# Altium PCB NanoPiAir_Shield_V1.PcbDoc (part 1 of 2)
Units mm, origin at the board's own origin, x right, y up, seen from the top; angles counter-clockwise.
Board outline 40 x 40 mm, 4 copper layers (Top Copper, Signal Layer 1, Signal Layer 2, Bottom Copper), stack 1.57 mm thick; 74 components, 57 nets, 352 pads, 255 vias.
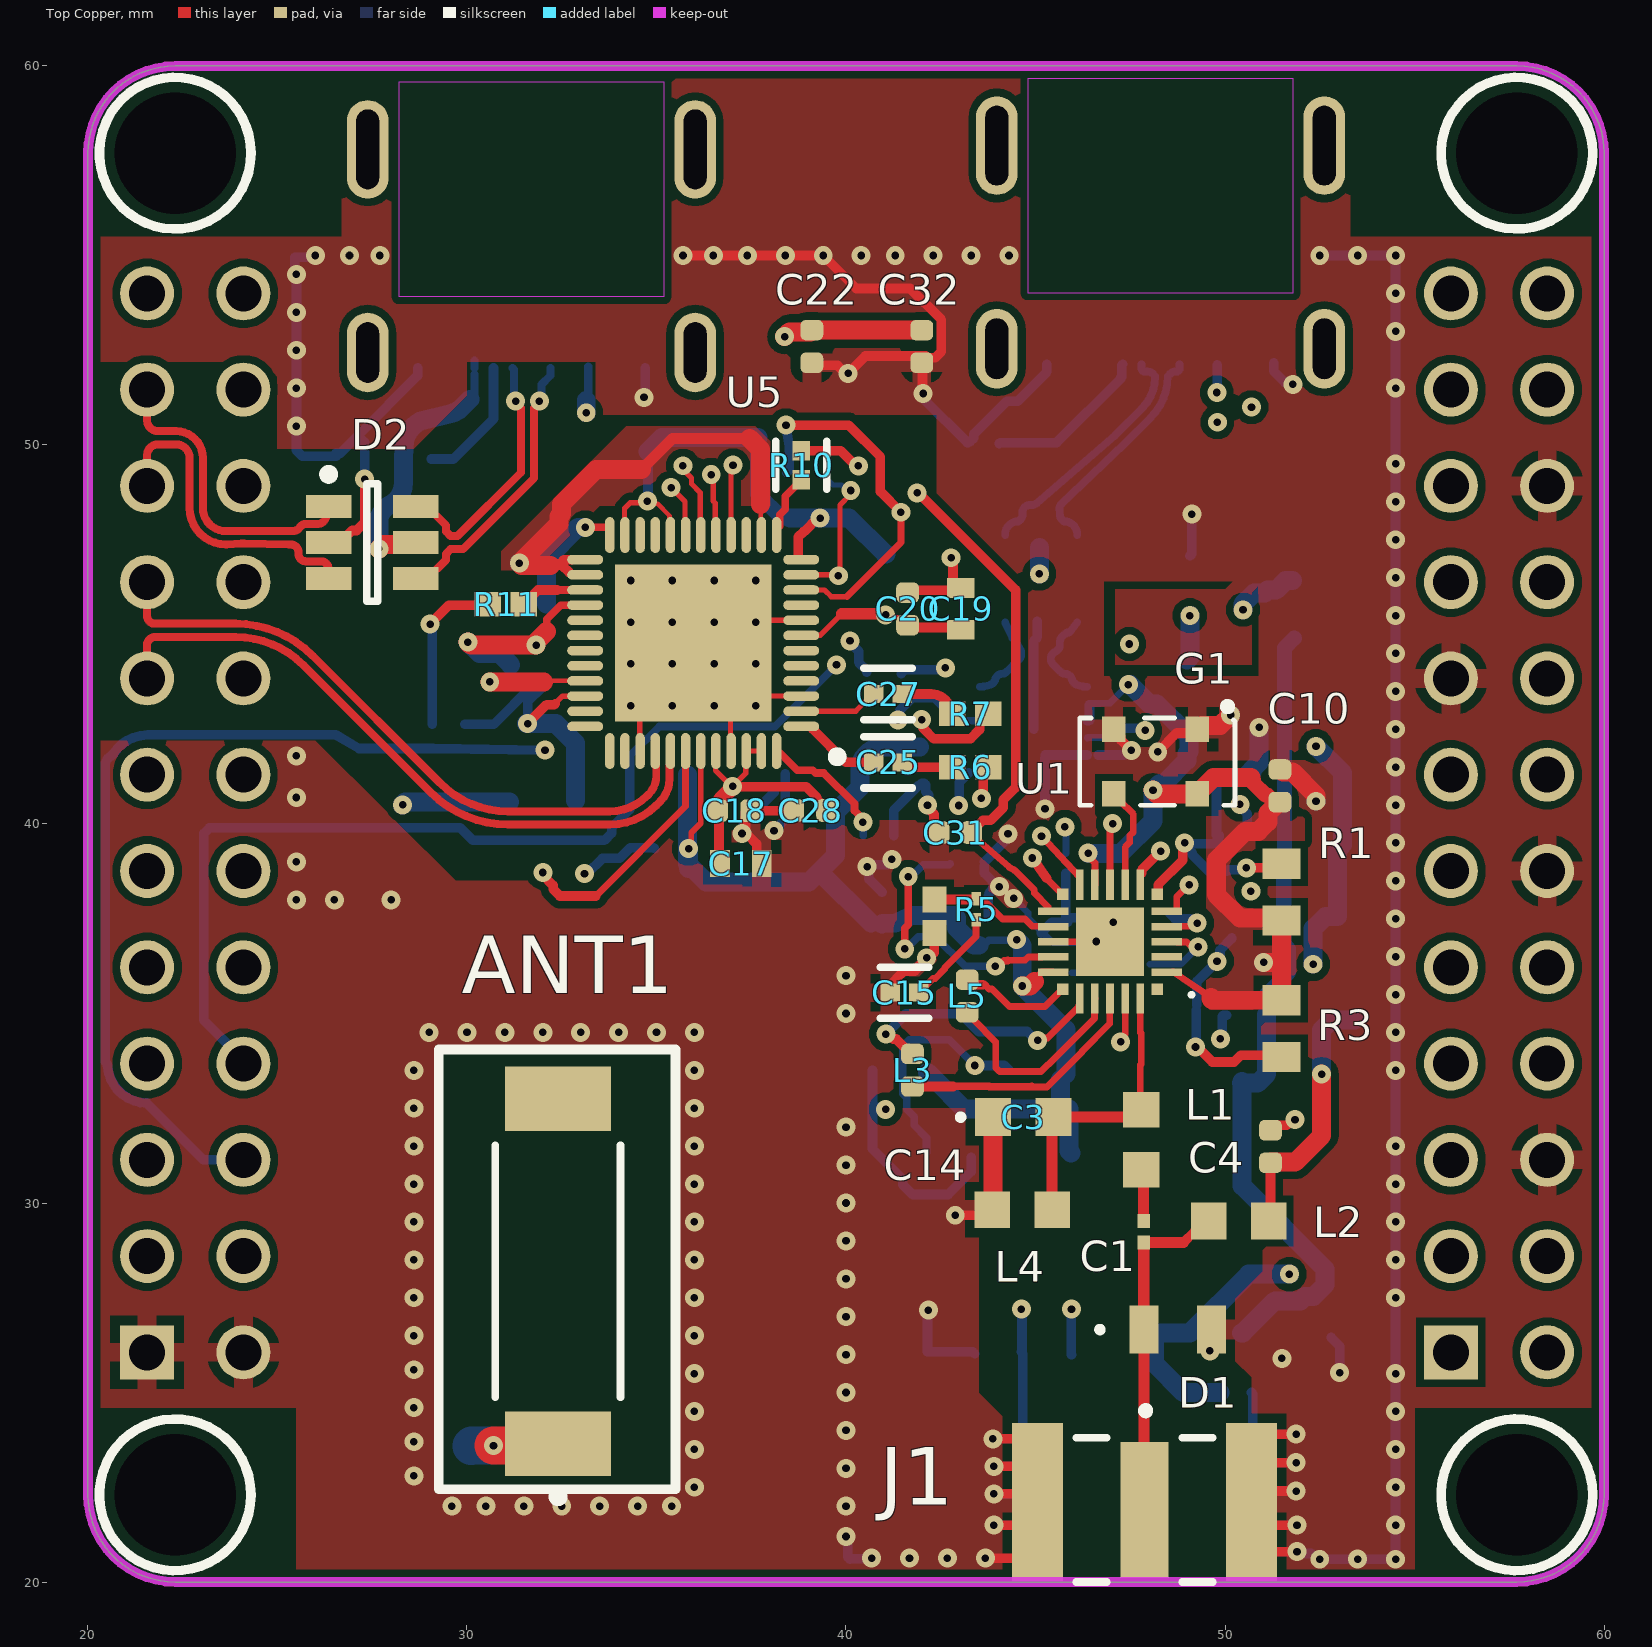
[diagram p0: Top Copper view]
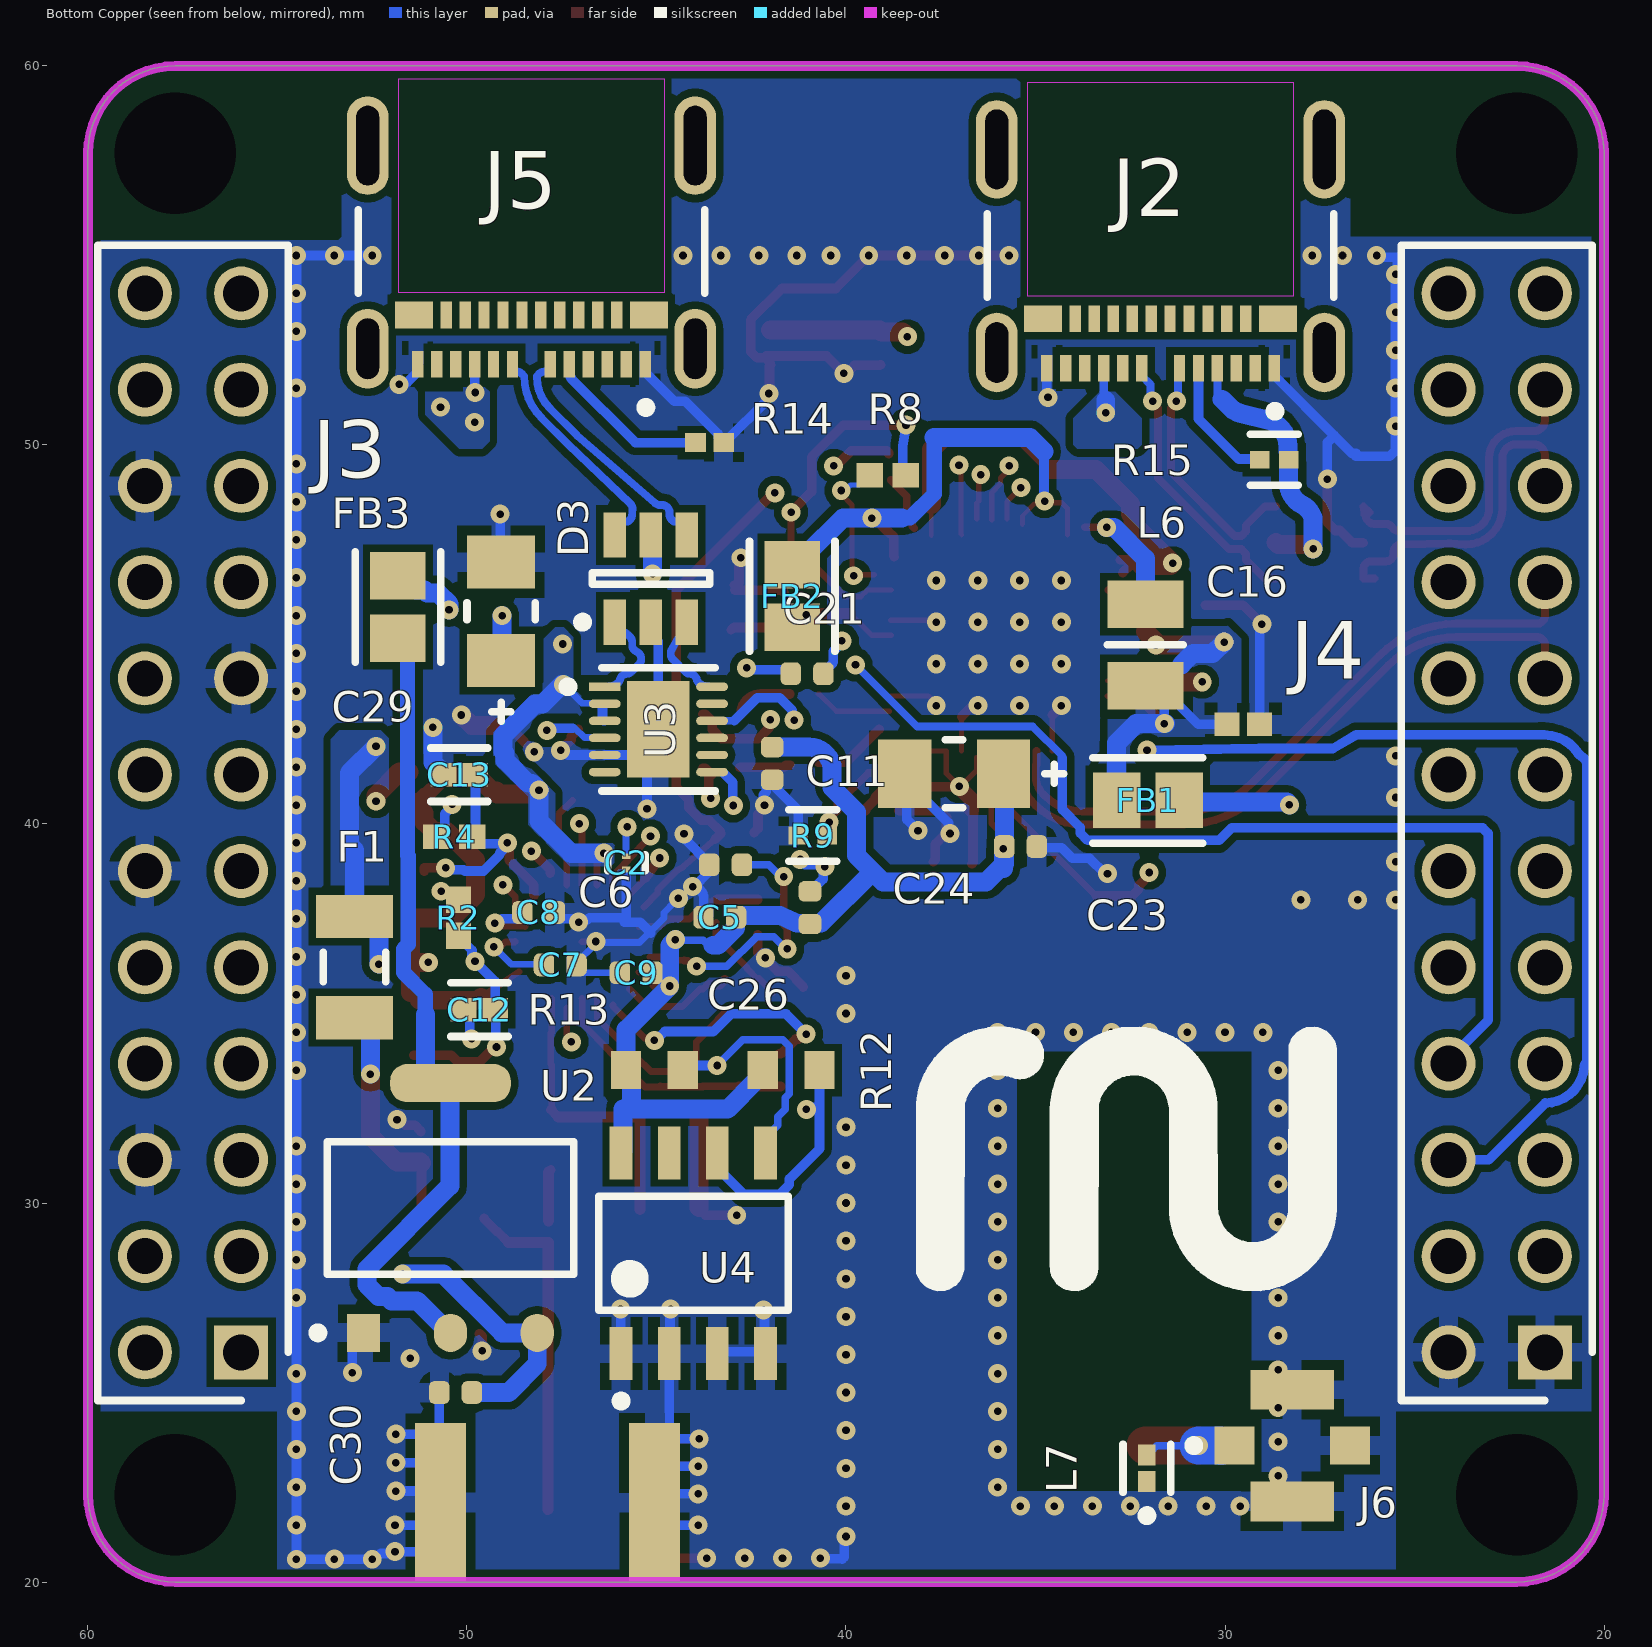
[diagram p1: Bottom Copper view, seen from below]
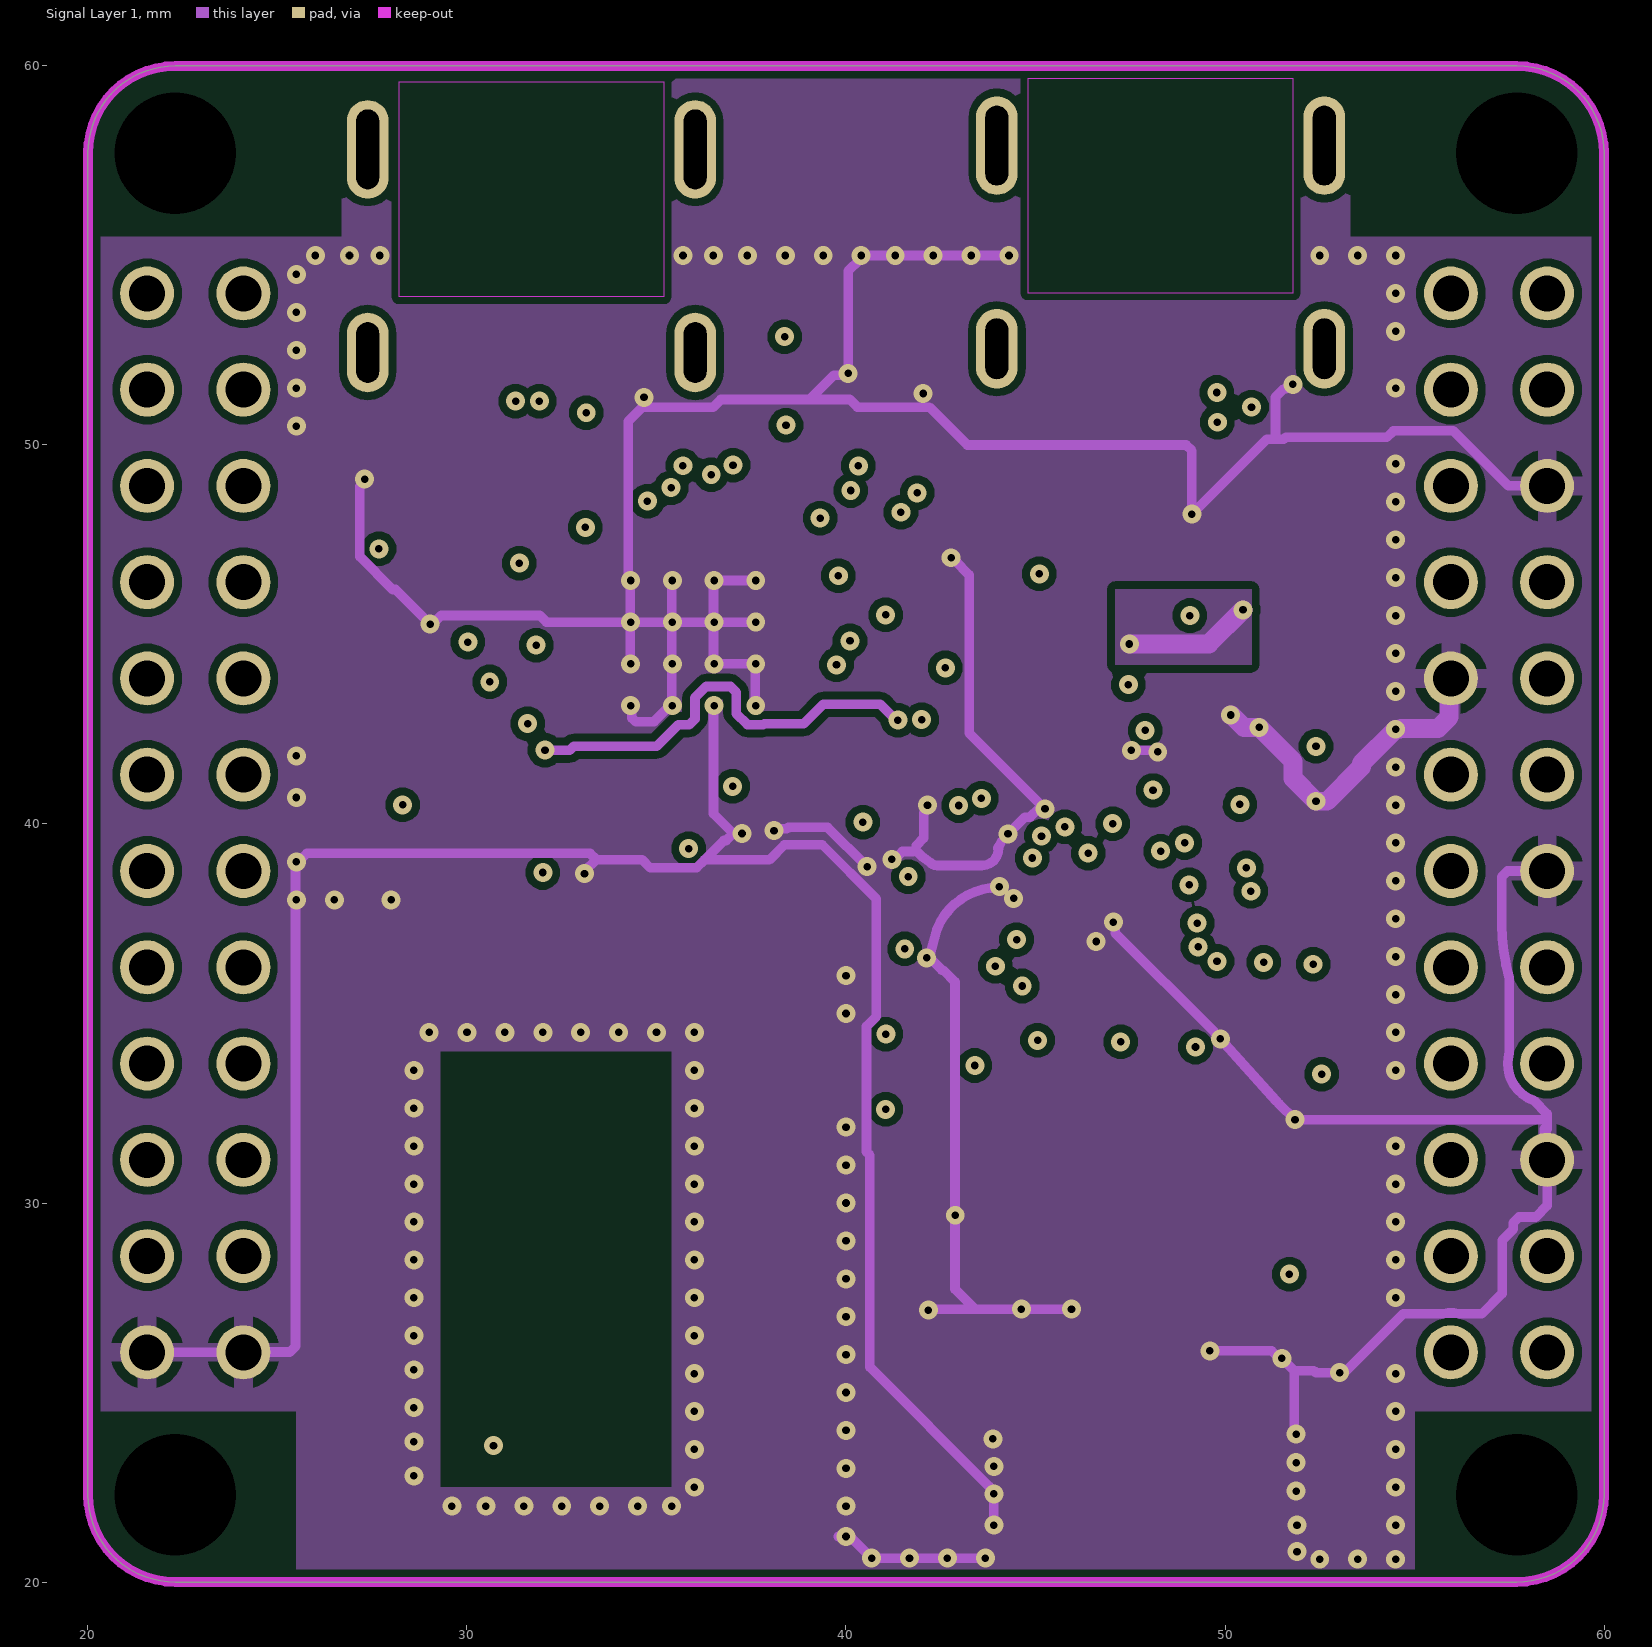
[diagram p2: Signal Layer 1]
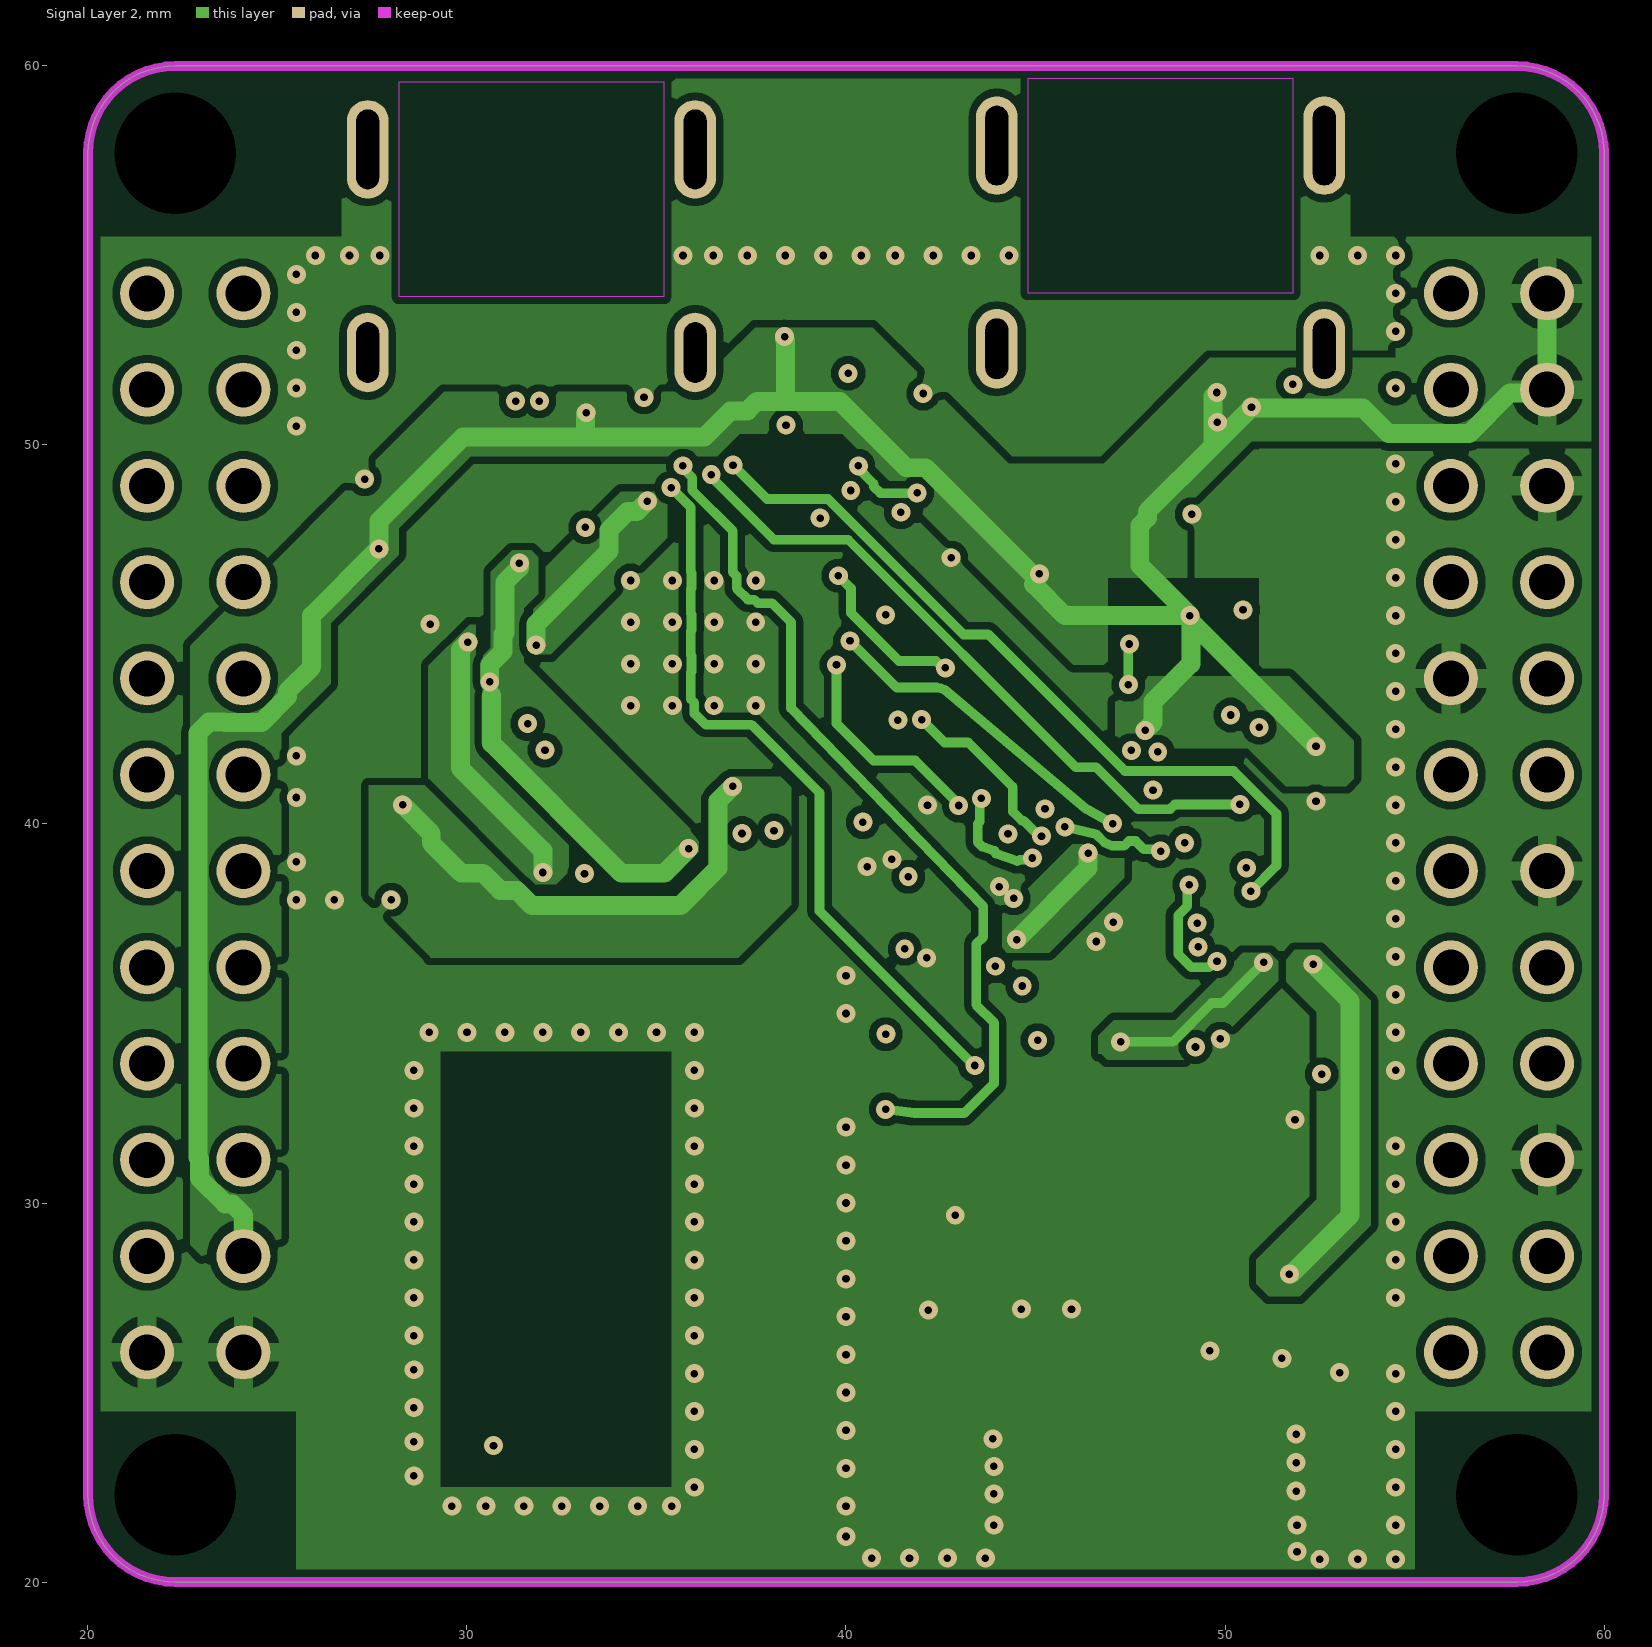
[diagram p3: Signal Layer 2]
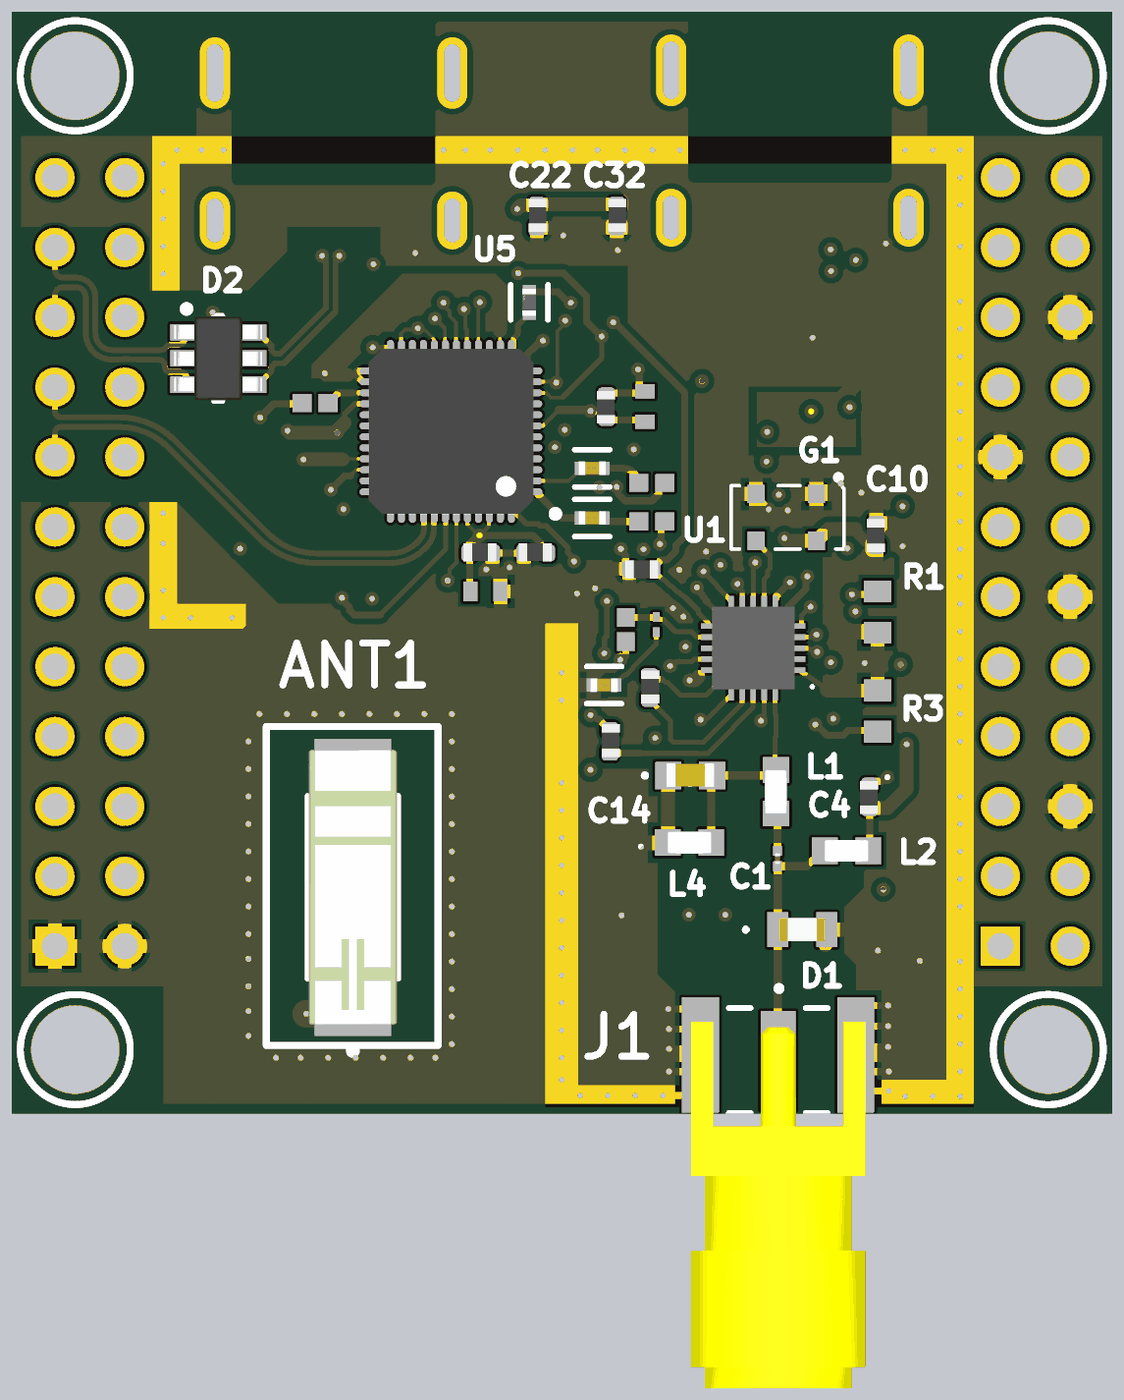
[diagram p5: 3D render of the assembled board from above, using the file's embedded part models]
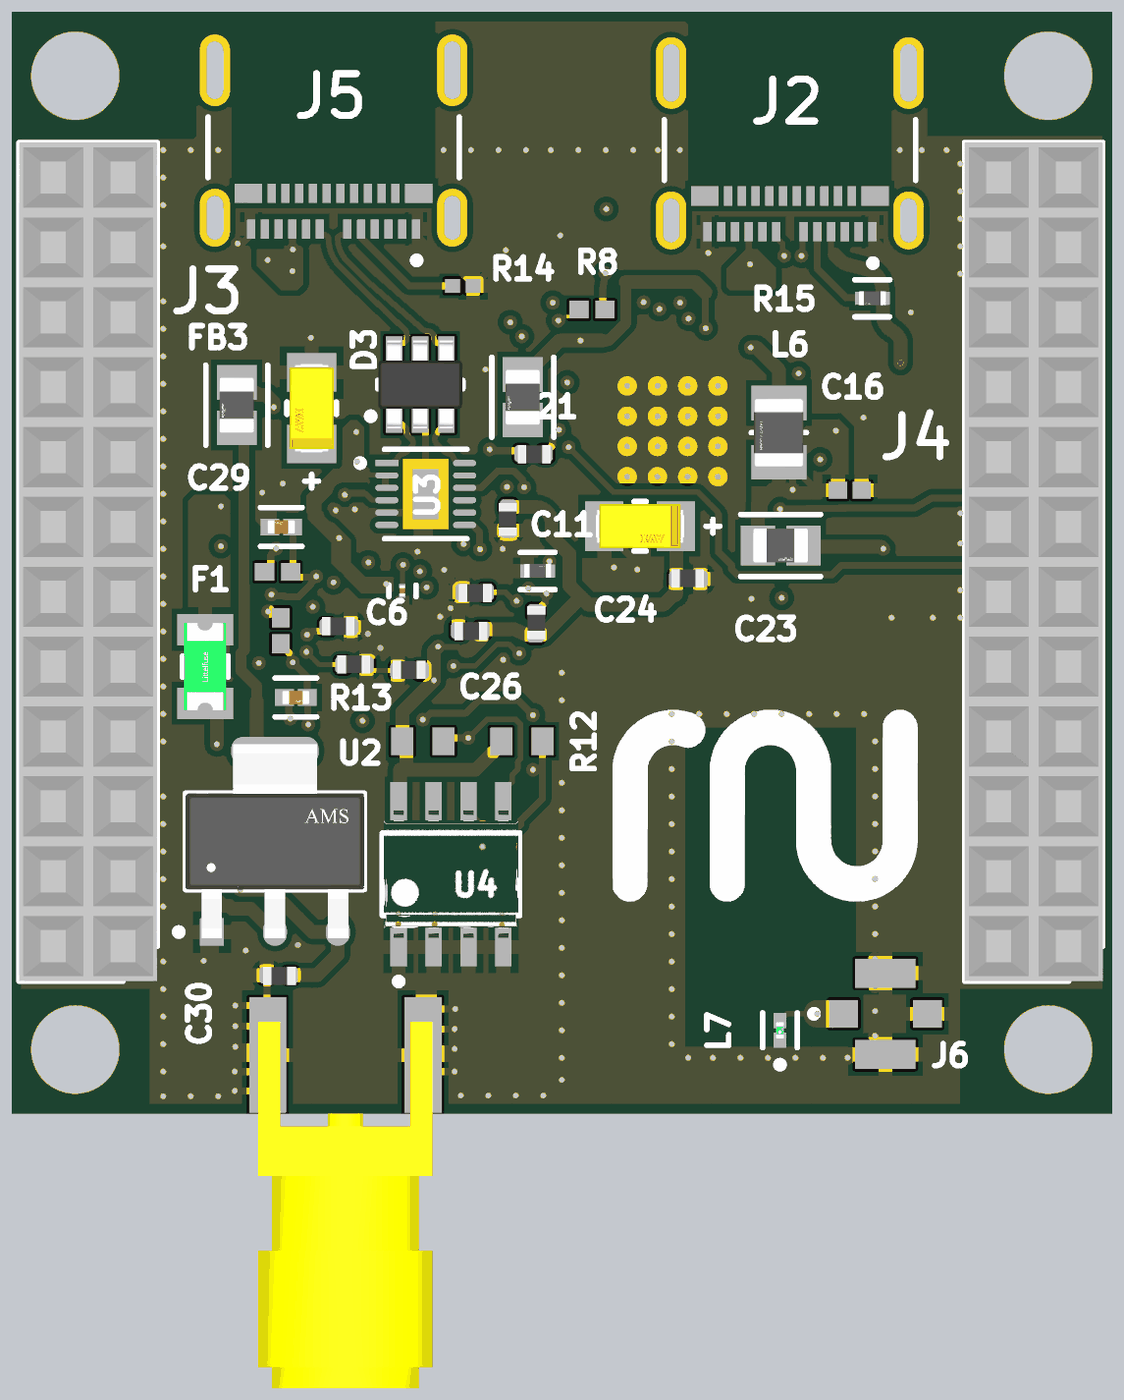
[diagram p6: 3D render of the assembled board from below, using the file's embedded part models]

## Layer stack, top to bottom
Top Mask: solder mask 0.015, Solder Resist, Dk 3.8
Top Copper: signal copper 0.035
Dielectric 1: prepreg 0.2, 7628, Dk 4.6
Signal Layer 1: signal copper 0.0175
Core: core 1.065, FR-4, Dk 4.5
Signal Layer 2: signal copper 0.0175
Dielectric 2: prepreg 0.2, 7628, Dk 4.6
Bottom Copper: signal copper 0.035
Bottom Mask: solder mask 0.015, Solder Resist, Dk 3.8

## Board outline
20,22.3 20,57.7 cw(c22.3,57.7) 22.3,60 57.7,60 cw(c57.7,57.7) 60,57.7 60,22.3 cw(c57.7,22.3) 57.7,20 22.3,20 cw(c22.3,22.3)

## Design rules (kind name [scope] priority, off if disabled: settings)
BoardOutlineClearance [All] p1: gap=0.2 ignorepadtopadclearanceinfootprint=FALSE except(0.4: Arc-SplitBarrior Arc-SplitContinuation Track-SplitBarrior Track-SplitContinuation SMDPad-SplitBarrior SMDPad-SplitContinuation THPad-SplitBarrior THPad-SplitContinuation Via-SplitBarrior Via-SplitContinuation Fill-SplitBarrior Fill-SplitContinuation Poly-SplitBarrior Poly-SplitContinuation Region-SplitBarrior Region-SplitContinuation Text-SplitBarrior Text-SplitContinuation)
Clearance "Clearance Bottom Layer" [OnLayer('Bottom Layer')] p1: gap=0.203 ignorepadtopadclearanceinfootprint=TRUE except(0.254: Arc-Text Track-Text SMDPad-Text THPad-Text Via-Text Fill-Text Poly-Text Region-Text Text-Text)
Clearance "Clearance Top Layer" [OnLayer('Top Layer')] p2: gap=0.203 ignorepadtopadclearanceinfootprint=TRUE except(0.2: SMDPad-SMDPad; 0.254: Arc-Text Track-Text SMDPad-Text THPad-Text Via-Text Fill-Text Poly-Text Region-Text Text-Text)
Clearance [All] p3: gap=0.2 ignorepadtopadclearanceinfootprint=FALSE except(0.089: Arc-Arc Arc-Track Arc-SMDPad Track-Track Track-SMDPad SMDPad-SMDPad; 0.127: Arc-Via Track-Via SMDPad-Via THPad-Via Via-Via; 0.254: Arc-Text Track-Text SMDPad-Text THPad-Text Via-Text Fill-Text Poly-Text Region-Text Text-Text)
DiffPairsRouting DiffPair_diff90DiffPairsRouting [InDifferentialPairClass('diff90')] p1: maxlimit=0.13 minlimit=0.127 mostfreqgap=0.127 toplayer_mingap=0.13 toplayer_prefgap=0.14 toplayer_minwidth=0.21 toplayer_maxwidth=0.21 toplayer_prefwidth=0.222 midlayer1_maxgap=0.127 midlayer1_minwidth=0.141 midlayer1_maxwidth=0.141 midlayer1_prefwidth=0.141 midlayer2_maxgap=0.127 midlayer2_minwidth=0.141 midlayer2_maxwidth=0.141 midlayer2_prefwidth=0.141 bottomlayer_maxgap=0.127 bottomlayer_minwidth=0.206 bottomlayer_maxwidth=0.206 bottomlayer_prefwidth=0.206 impedanceprofiledriven=TRUE impedanceprofileid={1B1D453C-0F2F-47A8-8A05-905E4E227881} impedanceprofilevalue=90.000000 maxuncoupledlength=12.7
DiffPairsRouting [All] p2: maxlimit=0.254 minlimit=0.203 mostfreqgap=0.203 toplayer_minwidth=0.12 toplayer_maxwidth=0.381 toplayer_prefwidth=0.261 midlayer1_minwidth=0.12 midlayer1_maxwidth=0.381 midlayer1_prefwidth=0.261 midlayer2_minwidth=0.12 midlayer2_maxwidth=0.381 midlayer2_prefwidth=0.261 bottomlayer_minwidth=0.12 bottomlayer_maxwidth=0.381 bottomlayer_prefwidth=0.261 maxuncoupledlength=12.7
HoleSize [All] p1: absolutevalues=TRUE maxlimit=6.3 minlimit=0.2 maxpercent=80.000 minpercent=20.000
MatchedLengths DiffPair_diff90MatchedLengths [InDifferentialPairClass('diff90')] p1: tolerance=25.4 checknetsindiffpair=FALSE checkdiffpairvsdiffpair=TRUE checkxsignals=TRUE checkothers=TRUE
MinimumAnnularRing [All] p1: minimumring=0.076
MinimumSolderMaskSliver [All] p1: minsoldermaskwidth=0.1
PlaneConnect [All] p1: planeconnectstyle=Direct reliefexpansion=0.508 reliefentries=4 reliefconductorwidth=0.254 reliefairgap=0.254
PolygonConnect PolygonConnect_1 [All] p1: thpad.connectstyle=Relief thpad.reliefconductorwidth=0.508 thpad.reliefentries=4 thpad.polygonreliefangle="90 Angle" thpad.airgapwidth=0.254 smdpad.connectstyle=Relief smdpad.reliefconductorwidth=0.508 smdpad.reliefentries=4 smdpad.polygonreliefangle="90 Angle" smdpad.airgapwidth=0.254 via.connectstyle=Direct via.reliefconductorwidth=0.508 via.reliefentries=4 via.polygonreliefangle="90 Angle" via.airgapwidth=0.254
RoutingCorners [All] p1: cornerstyle=Round minsetback=2.54 maxsetback=2.54
RoutingVias [All] p1: holewidth=0.5 width=1 viastyle="Through Hole" minholewidth=0.2 minwidth=0.45 maxholewidth=1 maxwidth=2
SilkToSilkClearance [All] p1: silktosilkclearance=0.1
SilkToSolderMaskClearance [IsPad] p1: minsilkscreentomaskgap=0.1 clearancetoexposedcopper=TRUE
SolderMaskExpansion [All] p1: expansion=0.102 istentingtop=FALSE
Width [All] p1: maxlimit=2.54 minlimit=0.089 preferedwidth=0.381
23 further rules are at their usual default settings.

## Classes and differential pairs
differential pair class diff90: EXTRA_USB_D RTL_SDR_USB_D USB_1 USB_2 USB_3
net class SHORT_NET: NetC2_1 NetC6_2 NetC7_2 NetC8_2 NetC14_2 NetC15_1 NetC21_1 NetC25_2 NetG1_3 NetL6_1 NetR8_1 NetR9_2 NetR11_1
net class RF_50: NetC3_2 RF1
net class Power: NetFB3_2 VCC VCC1.2V VCC_5V VCC_A1 VCC_PLL
net class IF_COILS: NetL3_1 NetL3_2 NetL5_1 NetL5_2
differential pair USB_3: +USB_3_P -USB_3_N
differential pair USB_2: +USB_2_P -USB_2_N
differential pair RTL_SDR_USB_D: +RTL_SDR_USB_D_P -RTL_SDR_USB_D_N
differential pair EXTRA_USB_D: +EXTRA_USB_D_P -EXTRA_USB_D_N
differential pair USB_1: +USB_1_P -USB_1_N

## Components (designator, comment, footprint, x,y, rotation, side; value= is the part's Value field where it differs from the comment)
ANT1 "W3006" FP-W3006-0 32.4,28.2 r90 top
C1 "10pF_GRM0225C1C100JA03L" CAPC0402X22N 47.85,29.243 r90 top
C2 "TMK042CG270JC-W" FP-01005-L_0_4_0_02-W_0_2-MFG 45.801,38.976 r270 bottom
C3 "5.6 pF" C0603 44.675,32.264 r0 top
C4 "0.1uF" CAPC1005X55N 51.2,31.489 r270 top
C5 "0.1uF" CAPC1005X55N 43.33,37.541 r180 bottom
C6 "0.1uF" CAPC1005X55N 43.175,38.925 r180 bottom
C7 "0.1uF" CAPC1005X55N 47.54,36.282 r0 bottom
C8 "0.1uF" CAPC1005X55N 48.11,37.666 r0 bottom
C9 "0.1uF" CAPC1005X55N 45.535,36.075 r0 bottom
C10 "0.1uF" CAPC1005X55N 51.45,41.008 r270 top
C11 "0.1uF" CAPC1005X55N 40.95,37.792 r90 bottom
C12 "04025A390JAT2A" FP-0402-L_1_0_1-W_0_5_0_1-IPC_B 49.675,35.1 r180 bottom
C13 "04025A390JAT2A" FP-0402-L_1_0_1-W_0_5_0_1-IPC_B 50.205,41.3 r0 bottom
C14 "04025C331KAT2A" CAPC1005X56X25NL10T15 42.332,37.567 r90 top
C15 "UMK105B7682KV-F" FP-0402-L_1_0_0_05-W_0_5-IPC_C 41.541,35.55 r180 top
C16 "C0402C221K5RAC7867" CAPC1005X60X30NL05T10 29.518,42.632 r0 bottom
C17 "TACK225M006QTA" CAPC1005X70X10NL20T00 37.225,38.956 r180 top
C18 "0.1uF" CAPC1005X55N 37.05,40.35 r180 top
C19 "TACK225M006QTA" CAPC1005X70X10NL20T00 43.025,45.675 r270 top
C20 "0.1uF" CAPC1005X55N 41.625,45.675 r270 top
C21 "0.1uF" CAPC1005X55N 41.025,43.965 r180 bottom
C22 "0.1uF" CAPC1005X55N 39.1,52.6 r90 top
C23 "TAJA106K010RNJ" FP-TAJA-MFG 37.15,41.326 r180 bottom
C24 "0.1uF" CAPC1005X55N 35.394,39.407 r0 bottom
C25 "UMK105B7682KV-F" FP-0402-L_1_0_0_05-W_0_5-IPC_C 41.109,41.626 r180 top
C26 "0.1uF" CAPC1005X55N 41.945,41.6 r270 bottom
C27 "UMK105B7682KV-F" FP-0402-L_1_0_0_05-W_0_5-IPC_C 41.109,43.43 r180 top
C28 "0.1uF" CAPC1005X55N 39.054,40.356 r180 top
C29 "TAJA106K010RNJ" FP-TAJA-MFG 49.1,45.616 r270 bottom
C30 "0.1uF" CAPC1005X55N 50.3,25 r180 bottom
C31 "0.1uF" CAPC1005X55N 42.887,39.775 r0 top
C32 "0.1uF" CAPC1005X55N 42,52.6 r90 top
D1 "PGB1010603NR" PGB1010603MR 48.75,26.659 r0 top
D2 "USBLC6-2SC6" STM-SOT23-6L_V 27.5,47.425 r0 top
D3 "USBLC6-2SC6" STM-SOT23-6L_V 45.15,46.475 r90 bottom
F1 "0466.200NR" FP-0466-MFG 52.97,36.225 r270 bottom
FB1 "BLM21AG121BH1D" FP-BLM21-0_2-t0_85-e0_5-IPC_B 32.036,40.625 r180 bottom
FB2 "BLM21AG121BH1D" FP-BLM21-0_2-t0_85-e0_5-IPC_B 41.418,46.013 r270 bottom
FB3 "BLM21AG121BH1D" FP-BLM21-0_2-t0_85-e0_5-IPC_B 51.825,45.725 r270 bottom
G1 "WTL S6 28.8MHz" XTAL_RTL_SDR(CHINA_WTL_S6) 48.167,41.697 r180 top
J1 "SMA-J-P-H-ST-EM1" SAMTEC_SMA-J-P-H-ST-EM1 47.875,21.9 r0 top
J2 "1054500101" FP-1054500101-MFG 31.7,55.8 r0 bottom
J3 "RPi connector right" RHDR24W77P254X254_2X12_3048X503X673P 55.96,26.06 r90 bottom
J4 "RPi connector left" RHDR24W77P254X254_2X12_3048X503X673P 21.56,26.06 r90 bottom
J5 "1054500101" FP-1054500101-MFG 48.3,55.9 r0 bottom
J6 "A-1JB" AMPH-A-1JB_V 28.225,23.6 r180 bottom
L1 "AIMC-0603-47NJ-T" INDC1608X95N 47.789,31.67 r90 top
L2 "180nH" INDC1608X95N 50.36,29.525 r180 top
L3 "MLG1005SR18JT" CAPC1005X55N 41.756,33.504 r90 top
L4 "AIML-0603-R10K-T" INDC1608X95N 44.65,29.825 r0 top
L5 "MLG1005SR18JT" CAPC1005X55N 43.196,35.463 r90 top
L6 "CB2518T4R7MR" FP-CB2518-IPC_B 32.1,44.725 r270 bottom
L7 "LQP03TN1N5C02D" FP-LQP03TG_02-IPC_A 32.061,23 r90 bottom
R1 "RC0603JR-074K7L" RESC1608X55X25ML10T15 51.495,38.204 r90 top
R2 "RC0402JR-13220RL" RESC1005X40X25ML05T10 50.225,37.525 r270 bottom
R3 "RC0603JR-074K7L" RESC1608X55X25ML10T15 51.495,34.6 r270 top
R4 "RC0402JR-13220RL" RESC1005X40X25ML05T10 50.339,39.665 r180 bottom
R5 "CRCW02011K80JNED" RESC0603X28X15LL05T05 43.436,37.75 r90 top
R6 "RC0402JR-13220RL" RESC1005X40X25ML05T10 43.275,41.5 r180 top
R7 "RC0402JR-13220RL" RESC1005X40X25ML05T10 43.274,42.904 r180 top
R8 "RC0402JR-07150KL" RESC1005X40X25ML05T10 38.901,49.2 r0 bottom
R9 "RC0402JR-0710KL" FP-RC0402-0_4-IPC_C 40.879,39.696 r180 bottom
R10 "RC0402JR-0710KL" FP-RC0402-0_4-IPC_C 38.819,49.465 r90 top
R11 "RC0402JR-13220RL" RESC1005X40X25ML05T10 31.025,45.8 r180 top
R12 "RC0603JR-074K7L" RESC1608X55X25ML10T15 41.45,33.504 r180 bottom
R13 "RC0603JR-074K7L" RESC1608X55X25ML10T15 45.054,33.504 r180 bottom
R14 "5.1K_CR0402-JW-512GLF" RESC1005X40X25LL10T10 43.6,50.061 r180 bottom
R15 "RC0402JR-0710KL" FP-RC0402-0_4-IPC_C 28.7,49.611 r0 bottom
U1 "RT820T" EFM8LB12F64ES0BQFN24 46.966,36.894 r180 top
U2 "AMS1117-3.3" FP-AMS1117-IPC_C 50.436,29.869 r90 bottom
U3 "FT234XD-R" FP-DFN-12-IPC_B 44.95,42.496 r180 bottom
U4 "M24C02-WMN6TP" FP-SO8N-SO-A-MFG 44.029,28.675 r90 bottom
U5 "RTL2832U" QFN40P600X600X84_HS-49N 35.969,44.775 r180 top

## Footprints (in the part's own frame and the unit in brackets; to place one, negate y for a bottom-side part, rotate by r counter-clockwise, add the part's x,y. Pads: shape width x height; smd on the part's side, far side on the other; paste and mask are expansions set on the pad)
AMPH-A-1JB_V [mm] "SMD, 4-Leads, Body 2.6x2.6mm"
  rect 1.05x1 smd: 1(-1.525,0) 3(1.525,0)
  rect 2.2x1.05 smd: 2(0,-1.475) 4(0,1.475)
  silkscreen extent -2.73,-0.12 -2.48,0.12, body extent -1.3,-1.3 1.3,1.3, height 1.35
C0603 [mm]
  rect 0.95x1 smd: 1(-0.8,0) 2(0.8,0)
  silkscreen extent -1.7,-0.05 -1.6,0.05, body extent -0.87,-0.43 0.87,0.45, height 0.94
CAPC0402X22N [mm]
  rect 0.365x0.33 smd: 1(-0.282,0) 2(0.282,0)
  body extent -0.2,-0.1 0.2,0.1, height 0.22
CAPC1005X55N [mm]
  rrect53% 0.54x0.6 smd: 1(-0.43,0) 2(0.43,0)
  body extent -0.57,-0.36 0.62,0.3, height 0.61
CAPC1005X56X25NL10T15 [mm] "Chip Capacitor, 2-Leads, Body 1.00x0.50mm, IPC Medium Density"
  rect 0.68x0.64 smd: 1(-0.44,0) 2(0.44,0)
  body extent -0.55,-0.3 0.55,0.3, height 0.56
CAPC1005X60X30NL05T10 [mm] "Chip Capacitor, 2-Leads, Body 1.00x0.50mm, IPC Medium Density"
  rect 0.66x0.62 smd: 1(-0.43,0) 2(0.43,0)
  body extent -0.53,-0.28 0.53,0.27, height 0.6
CAPC1005X70X10NL20T00 [mm] "Chip Capacitor, 2-Leads, Body 1.00x0.50mm, IPC Medium Density"
  rect 0.52x0.72 smd: 1(-0.55,0) 2(0.55,0)
  body extent -0.6,-0.35 0.6,0.35, height 0.7
EFM8LB12F64ES0BQFN24 [mm]
  rect 0.3x0.3 smd: 1(-1.25,1.25) 7(-1.25,-1.25) 13(1.25,-1.25) 19(1.25,1.25)
  rect 0.8x0.2 smd: 2(-1.5,0.8) 3(-1.5,0.4) 4(-1.5,0) 5(-1.5,-0.4) 6(-1.5,-0.8) 14(1.5,-0.8) 15(1.5,-0.4) 16(1.5,0) 17(1.5,0.4) 18(1.5,0.8)
  rect 0.2x0.8 smd: 8(-0.8,-1.5) 9(-0.4,-1.5) 10(0,-1.5) 11(0.4,-1.5) 12(0.8,-1.5) 20(0.8,1.5) 21(0.4,1.5) 22(0,1.5) 23(-0.4,1.5) 24(-0.8,1.5)
  rect 1.8x1.8 smd: 25(0,0)
  silkscreen extent -2.2,1.35 -2.1,1.45, body extent -1.5,-1.5 1.5,1.5, height 1
FP-0402-L_1_0_0_05-W_0_5-IPC_C [mm]
  rect 0.515x0.472 smd paste+0 mask+0: 1(-0.379,0) 2(0.379,0)
  silkscreen extent -0.64,-0.68 0.64,0.67, body extent -0.74,-0.38 0.74,0.38, height 0.25
FP-0402-L_1_0_1-W_0_5_0_1-IPC_B [mm]
  rect 0.681x0.612 smd paste+0 mask+0: 1(-0.416,0) 2(0.416,0)
  silkscreen extent -0.76,-0.71 0.76,0.71, body extent -0.5,-0.25 0.5,0.25, height 0.56
FP-0466-MFG [mil]
  rect 45x80 smd paste+0 mask+0: 1(-52.5,0) 2(52.5,0)
  silkscreen extent -15,-32 15,33, body extent -62,-30 63,30, height 26
FP-01005-L_0_4_0_02-W_0_2-MFG [mm]
  rect 0.15x0.225 smd paste+0 mask+0: 1(-0.175,0) 2(0.175,0)
  silkscreen extent -0.21,-0.49 0.21,0.5, body extent -0.2,-0.1 0.2,0.1, height 0.22
FP-1054500101-MFG [mm]
  rrect100% 1.1x2.1 hole 1.6 slot 0.6 at 0 deg paste-1000 mask+0: 1(-4.32,3.36) 2(4.32,3.36)
  rrect100% 1.1x2.6 hole 2.1 slot 0.6 at 0 deg paste-1000 mask+0: 3(-4.32,-2) 4(4.32,-2)
  rect 0.3x0.7 smd paste+0 mask+0: A1(-3,3.77) A2(-2.5,3.77) A3(-2,3.77) A4(-1.5,3.77) A5(-1,3.77) A6(-0.5,3.77) A7(0.5,3.77) A8(1,3.77) A9(1.5,3.77) A10(2,3.77) A11(2.5,3.77) A12(3,3.77) B2(2.25,2.47) B3(1.75,2.47) B4(1.25,2.47) B5(0.75,2.47) B6(0.25,2.47) B7(-0.25,2.47) B8(-0.75,2.47) B9(-1.25,2.47) B10(-1.75,2.47) B11(-2.25,2.47)
  rect 1x0.7 smd paste+0 mask+0: B1(3.1,2.47) B12(-3.1,2.47)
  Keep-Out Layer region: -3.5,1.88 3.5,1.88 3.5,-3.77 -3.5,-3.77
  silkscreen extent -4.57,-0.3 4.57,5.03
FP-AMS1117-IPC_C [mm]
  rect 1.004x0.872 smd paste+0 mask+0: 1(-3.295,2.29)
  rrect100% 1.004x0.872 smd paste+0 mask+0: 2(-3.295,0) 3(-3.295,-2.29)
  rrect87% 1.004x3.182 smd paste+0 mask+0: 4(3.295,0)
  silkscreen extent -3.42,-3.25 1.75,3.63, body extent -3.53,-3.25 3.53,3.25, height 1.8
FP-BLM21-0_2-t0_85-e0_5-IPC_B [mm]
  rect 1.255x1.456 smd paste+0 mask+0: 1(-0.826,0) 2(0.826,0)
  silkscreen extent -1.45,-1.13 1.45,1.13, body extent -1,-0.63 1,0.63, height 1.05
FP-CB2518-IPC_B [mm]
  rect 1.255x2.006 smd paste+0 mask+0: 1(-1.076,0) 2(1.076,0)
  silkscreen extent 0,-1 0,1, body extent -1.25,-0.9 1.25,0.9, height 2
FP-DFN-12-IPC_B [mm]
  rect 0.84x0.222 smd paste+0 mask+0: 1(-1.416,1.125)
  rrect100% 0.84x0.222 smd paste+0 mask+0: 2(-1.416,0.675) 3(-1.416,0.225) 4(-1.416,-0.225) 5(-1.416,-0.675) 6(-1.416,-1.125) 7(1.416,-1.125) 8(1.416,-0.675) 9(1.416,-0.225) 10(1.416,0.225) 11(1.416,0.675) 12(1.416,1.125)
  rect 1.65x2.55 smd paste-1000 mask+0: 13(0,0)
  silkscreen extent -2.51,-1.63 1.5,1.63
FP-LQP03TG_02-IPC_A [mm]
  rect 0.554x0.463 smd paste+0 mask+0: 1(-0.354,0) 2(0.354,0)
  silkscreen extent -1.37,-0.63 0.63,0.63, body extent -0.3,-0.15 0.3,0.15, height 0.33
FP-RC0402-0_4-IPC_C [mm]
  rect 0.515x0.472 smd paste+0 mask+0: 1(-0.379,0) 2(0.379,0)
  silkscreen extent -0.64,-0.67 0.64,0.68, body extent -0.5,-0.25 0.5,0.25, height 0.4
FP-SO8N-SO-A-MFG [mm]
  rect 1.4x0.6 smd paste+0 mask+0: 1(-2.65,1.905) 2(-2.65,0.635) 3(-2.65,-0.635) 4(-2.65,-1.905) 5(2.65,-1.905) 6(2.65,-0.635) 7(2.65,0.635) 8(2.65,1.905)
  silkscreen extent -4.02,-2.5 1.5,2.5, body extent -3,-2.45 3,2.45, height 1.75
FP-TAJA-MFG [mm]
  rect 1.4x1.8 smd paste+0 mask+0: 1(-1.3,0) 2(1.3,0)
  silkscreen extent -0.23,-0.9 2.9,0.9, body extent -1.6,-0.8 1.6,0.8, height 1.8
FP-W3006-0 [mm]
  rect 1.7x2.8 smd paste+0 mask+0: 1(-4.55,0) 2(4.55,0)
  silkscreen extent -6.07,-1.65 3.32,1.65, body extent -5.5,-1.75 5.5,1.75, height 0.25
INDC1608X95N [mm]
  rect 0.94x0.97 smd: 1(-0.79,0) 2(0.79,0)
  body extent -0.8,-0.4 0.8,0.4, height 0.78
PGB1010603MR [mm]
  rect 0.76x1.27 smd: 1(-0.89,0) 2(0.89,0)
  silkscreen extent -2.1,-0.05 -2,0.05, body extent -0.83,-0.42 0.83,0.42, height 0.36
QFN40P600X600X84_HS-49N [mm] "QFN, 48-Leads, Body 6,00x6,00mm, Pitch 0,40mm, Thermal Pad 4,14x4,14mm, IPC Medium Density"
  oval 0.95x0.25 smd: 1(-2.85,2.2) 2(-2.85,1.8) 3(-2.85,1.4) 4(-2.85,1) 5(-2.85,0.6) 6(-2.85,0.2) 7(-2.85,-0.2) 8(-2.85,-0.6) 9(-2.85,-1) 10(-2.85,-1.4) 11(-2.85,-1.8) 12(-2.85,-2.2) 25(2.85,-2.2) 26(2.85,-1.8) 27(2.85,-1.4) 28(2.85,-1) 29(2.85,-0.6) 30(2.85,-0.2) 31(2.85,0.2) 32(2.85,0.6) 33(2.85,1) 34(2.85,1.4) 35(2.85,1.8) 36(2.85,2.2)
  oval 0.25x0.95 smd: 13(-2.2,-2.85) 14(-1.8,-2.85) 15(-1.4,-2.85) 16(-1,-2.85) 17(-0.6,-2.85) 18(-0.2,-2.85) 19(0.2,-2.85) 20(0.6,-2.85) 21(1,-2.85) 22(1.4,-2.85) 23(1.8,-2.85) 24(2.2,-2.85) 37(2.2,2.85) 38(1.8,2.85) 39(1.4,2.85) 40(1,2.85) 41(0.6,2.85) 42(0.2,2.85) 43(-0.2,2.85) 44(-0.6,2.85) 45(-1,2.85) 46(-1.4,2.85) 47(-1.8,2.85) 48(-2.2,2.85)
  rect 4.14x4.14 smd: 49(0,0)
  silkscreen extent -3.93,2.88 -3.68,3.12, body extent -3.01,-3.01 3.01,3.01, height 0.84
RESC0603X28X15LL05T05 [mm] "Chip Resistor, 2-Leads, Body 0.60x0.30mm, IPC High Density"
  rect 0.35x0.25 smd: 1(-0.275,0) 2(0.275,0)
  body extent -0.33,-0.17 0.32,0.18, height 0.28
RESC1005X40X25LL10T10 [mm] "Chip Resistor, 2-Leads, Body 1.00x0.50mm, IPC High Density"
  rect 0.55x0.5 smd: 1(-0.375,0) 2(0.375,0)
  body extent -0.55,-0.3 0.55,0.3, height 0.4
RESC1005X40X25ML05T10 [mm] "Chip Resistor, 2-Leads, Body 1.00x0.50mm, IPC Low Density"
  rect 0.7x0.65 smd: 1(-0.475,0) 2(0.475,0)
  body extent -0.53,-0.27 0.53,0.28, height 0.4
RESC1608X55X25ML10T15 [mm] "Chip Resistor, 2-Leads, Body 1.60x0.80mm, IPC Low Density"
  rect 0.8x1 smd: 1(-0.75,0) 2(0.75,0)
  body extent -0.85,-0.45 0.85,0.45, height 0.55
RHDR24W77P254X254_2X12_3048X503X673P [mm]
  rect 1.425x1.425 / inner round 1.425 / far side rect 1.425x1.425 hole 0.95: 1(0,0)
  round 1.425 hole 0.95: 2(0,2.54) 3(2.54,0) 4(2.54,2.54) 5(5.08,0) 6(5.08,2.54) 7(7.62,0) 8(7.62,2.54) 9(10.16,0) 10(10.16,2.54) 11(12.7,0) 12(12.7,2.54) 13(15.24,0) 14(15.24,2.54) 15(17.78,0) 16(17.78,2.54) 17(20.32,0) 18(20.32,2.54) 19(22.86,0) 20(22.86,2.54) 21(25.4,0) 22(25.4,2.54) 23(27.94,0) 24(27.94,2.54)
  silkscreen extent -1.27,-1.24 29.21,3.79, body extent -1.27,-1.24 29.21,3.78, height 6.22
SAMTEC_SMA-J-P-H-ST-EM1 [mm]
  rect 1.27x3.6 smd: 1(0,0)
  rect 1.35x4.2 smd: 2_1(-2.825,0.2) 3_1(2.825,0.2)
  rect 1.35x4.2 smd far side: 2_2(-2.825,0.2) 3_2(2.825,0.2)
  silkscreen extent -1.8,-1.9 1.8,2.72, body extent -3.17,-11.91 3.17,1.42, height 3.17
STM-SOT23-6L_V [mm] "SOT23, 6-Leads, Body 3.05x1.75mm, Pitch 0.95mm"
  rect 1.2x0.6 smd: 1(-1.15,0.95) 2(-1.15,0) 3(-1.15,-0.95) 4(1.15,-0.95) 5(1.15,0) 6(1.15,0.95)
  silkscreen extent -1.27,-1.55 0.15,1.92, body extent -1.6,-1.53 1.6,1.53, height 1.45
XTAL_RTL_SDR(CHINA_WTL_S6) [mm]
  rect 0.62x0.67 smd: 1(-1.1,-0.8) 2(1.1,-0.8) 3(1.1,0.9) 4(-1.1,0.9)
  silkscreen extent -2.1,-1.5 2,1.2

## Part data
ANT1: library part CMP-16379-000003-1, "RF ANT 2.4GHZ/5.5GHZ CHIP SLD", Case/Package=SMD/SMT, Frequency=5GHz, Max Frequency=5.85GHz, Max Operating Temperature=85°C, Min Frequency=2.4GHz, Min Operating Temperature=-40°C, Package Quantity=1, Contact Plating=Tin, Height=0.059inch, Impedance=50R, Length=10mm, Mount="Surface Mount", Number of Bands=2, Number of Pins=2, Packaging=Bulk, Radiation Hardening=No, Return Loss=-10dB, RoHS Compliant=Yes, Series=-, Termination=Solder, Width=3.2mm
C1: library part GRM0225C1C100JA03L, "Cap Ceramic 10pF 16V C0G 5% Pad SMD 01005 125C T/R", Manufacturer_Name="Murata Electronics", Mouser Part Number=81-GRM0225C1C100JA3L, Datasheet Link=https://datasheet.datasheetarchive.com/originals/distributors/DKDS-10/189393.pdf, Geometry.Height=0.22mm, Manufacturer_Part_Number=GRM0225C1C100JA03L, Mouser Price/Stock=https://www.mouser.co.uk/ProductDetail/Murata-Electronics/GRM0225C1C100JA03L?qs=qkDYIeTQ%252BEn9GodD6pJsiA%3D%3D
C2: library part CMP-14477-000467-2, "None", RoHS Compliant=Yes
C3: library part C0603C569C5GACTU, "SMD Comm C0G, Ceramic, 5.6 pF, +/-0.25 pF, 50 VDC, 125 VDC, 125C, -55C, C0G, SMD, MLCC, Ultra-Stable, Low Loss, Class I, 0.1 % , 100 GOhms, 3.7 mg, 0603, 1.6mm, 0.8mm, 0.8mm, 0.7mm, 0.35mm, 4000, 78  Weeks, 120", Manufacturer_Name=KEMET, Mouser Part Number=80-C0603C569C5G, Datasheet Link=https://content.kemet.com/datasheets/KEM_C1003_C0G_SMD.pdf, Geometry.Height=0.87mm, Manufacturer_Part_Number=C0603C569C5GACTU, Mouser Price/Stock=https://www.mouser.co.uk/ProductDetail/KEMET/C0603C569C5GACTU?qs=5GGmbjqkbYeYpfQi22ubQQ%3D%3D
C4 C5 C6 C7 C8 C9 C10 C11 C18 C20 C21 C22 C24 C26 C28 C30 C31 C32: library part LMF105B7104KVHF, Package=None, Availability=Unavailable, MP=LMF105B7104KVHF, Price=None
C12 C13: library part CMP-1034-01046-3, "General Purpose Ceramic Capacitor, 0402, 39pF, 5%, C0G, 30ppm/°C, 50V", Capacitance=39pF, Case Code (Imperial)=0402, Case Code (Metric)=1005, Dielectric=C0G, Dielectric Material=Ceramic, Max Operating Temperature=125°C, Min Operating Temperature=-55°C, Package Quantity=10000, Temperature Coefficient=0ppm/°C, Tolerance=5%, Voltage=50V, Case/Package=0402, Construction=Flat, Contact Plating=Tin, Depth=0.5mm, Height=0.5mm, Lead Free="Lead Free", Length=1mm, Mount="Surface Mount", Number of Pins=2, Packaging="Tape and Reel", Radiation Hardening=No, REACH SVHC="No SVHC", RoHS Compliant=Yes, Series=0402, Termination=SMD/SMT, Thickness=0.022inch, Voltage Rating=50V, Voltage Rating (DC)=50V, Width=0.02inch
C14: library part CMP-2008-02720-1, Manufacturer="AVX Interconnect / Elco", Part Number=04025C331KAT2A
C15 C25 C27: library part CMP-14477-001974-2, "None", Capacitance=6.8nF, Case Code (Imperial)=0402, Case Code (Metric)=1005, Dielectric=X7R, Max Operating Temperature=125°C, Min Operating Temperature=-55°C, Package Quantity=10000, Tolerance=10%, Voltage=50V, Case/Package=0402, Construction=Flat, Depth=0.5mm, Halogen Free="Halogen Free", Height=0.5mm, Lead Free="Lead Free", Length=1mm, Mount="Surface Mount", Packaging="Tape and Reel", Radiation Hardening=No, RoHS Compliant=Yes, Series=M, Termination=SMD/SMT, Thickness=0.022inch, Voltage Rating=50V, Voltage Rating (DC)=50V, Width=0.02inch
C16: library part CMP-2008-03137-2, Manufacturer=Kemet, Part Number=C0402C221K5RAC7867
C17 C19: library part CMP-2008-00070-1, Manufacturer="AVX Interconnect / Elco", Part Number=TACK225M006QTA
C23 C29: library part CMP-2000-07217-2, "10uF 10V  ±10% 3Ω 1206  SMD Tantalum Capacitor", Capacitance=10uF, Case Code (Imperial)=1206, Case Code (Metric)=3216, Dielectric Material=Tantalum, ESR (Equivalent Series Resistance)=3R, Leakage Current=1uA, Max Operating Temperature=125°C, Min Operating Temperature=-55°C, Package Quantity=1, Tolerance=10%, Voltage=10V, Case/Package=1206, Construction=Flat, Depth=1.6mm, Dissipation Factor=6%, Features="General Purpose", Height=1.6mm, Height - Seated (Max)=0.071inch, Lead Free="Lead Free", Length=3.2mm, Mount="Surface Mount", Number of Pins=2, Packaging="Tape and Reel", Polarity=Polar, Q Factor=6, Radiation Hardening=No, REACH SVHC="No SVHC", RoHS Compliant=Yes, Series=TAJ, Termination=SMD/SMT, Voltage Rating=10V, Voltage Rating (DC)=10V, Width=1.6mm
D1: "ESD Suppressors / TVS Diodes 0603 24VDC .06pF", Manufacturer_Name=LITTELFUSE, Mouser Part Number=576-PGB1010603NR, Datasheet Link=https://www.littelfuse.com/data/en/data_sheets/littelfuse_pulseguard-esd_pgb1.pdf, Geometry.Height=0.36mm, Manufacturer_Part_Number=PGB1010603NR, Mouser Price/Stock=https://www.mouser.co.uk/ProductDetail/Littelfuse/PGB1010603NR?qs=gu7KAQ731UTJOoBJUwB8FA%3D%3D
D2 D3: library part CMP-2000-05378-1, "Very low capacitance ESD protection, 3.5 pF, -40 to 125 degC, 6-Pin SOT23, RoHS, Tape and Reel", Capacitance Value=3.5pF, Clamping Voltage=17V, Leakage Current=0.15uA, Manufacturer=STMicroelectronics, Operating Temp Range=-40Cto125C, Operating Temperature Classification=Automotive, Operating Temperature Max Deg. C=125C, Operating Temperature Min Deg. C=-40C, Package / Case=SOT-23, Package Description="6-Pin Small Outline Transistor, Body 2.925 x 1.625 mm, Pitch 0.95 mm", Package Reference=SOT23-6L, Peak Pulse Current=5A, Reverse Breakdown Voltage=6V, Reverse Stand-off Voltage=5V, Test Current (It)=1mA, Clamping Voltage (Max)=17V, Configuration=Dual, Datasheet URL=http://www.st.com/st-web-ui/static/active/en/resource/technical/document/datasheet/CD00050750.pdf, Datasheet Version="Rev. 5, 10/2011", Direction Type=Uni-Directional, Leakage Current (Max)=0.15uA, Manufacturer URL=http://www.st.com/, Mounting=SurfaceMount, Mounting Style=SurfaceMount, Number of Elements=1, Packaging=TapeandReel, Pin Count=6, Polarity=Uni-Directional, Product Depth (mm)=1.75mm, Product Height (mm)=1.3mm, Product Length (mm)=3.05mm, Rad Hardened=No, Suppressor Type=DiodeArrays, Working Voltage=5V, Working Voltage (Max)=5V
F1: library part CMP-08605-000081-1, "FUSE BOARD MNT 200MA 125VAC/VDC", Case Code (Imperial)=1206, Case Code (Metric)=3216, Current Rating=200mA, DC Cold Resistance=1.16R, Max Operating Temperature=90°C, Min Operating Temperature=-55°C, Package Quantity=5000, Resistance=1.15R, Voltage Rating=125V, Approvals=UL, Body Material=Thermoplastic, Case/Package=1206, Depth=1.52mm, Fuse Current=200mA, Fuse Type="Board Mount (Cartridge Style Excluded)", Height=0.023inch, Housing Material=Ceramic, Lead Free="Lead Free", Length=3.18mm, Mount="Surface Mount", Number of Pins=2, Packaging="Tape and Reel", Radiation Hardening=No, Terminal Material=Copper, Termination=SMD/SMT, Voltage Rating (AC)=125V, Voltage Rating (DC)=125V, Width=0.06inch, Working Voltage=125V
FB1 FB2 FB3: library part CMP-06046-002535-1, "Chip Ferrite Bead, 0805, 120Ω @ 100MHz, 0.09Ω, 25%, 1A", RoHS Compliant=Yes
G1: "28.2 MHz Â±1ppm Generator", Package="SOJ-4 ECS International", Check_prices=https://www.snapeda.com/parts/ECS-160-18-7SX-TR/ECS+Inc./view-part/?ref=eda, ComponentLink1Description="New link", ComponentLink1URL=https://aliexpress.ru/item/1005003294067027.html?sku_id=12000025061369255&spm=a2g2w.productlist.search_results.25.2fdd4aa6qno35b, Digi-Key_Part_Number=XC2021-2-ND, MF="ECS Inc.", MP=ECS-160-18-7SX-TR, Purchase-URL=https://pricing.snapeda.com/search/part/ECS-160-18-7SX-TR/?ref=eda, SnapEDA_Link=https://www.snapeda.com/parts/ECS-160-18-7SX-TR/ECS+Inc./view-part/?ref=snap
J1: "SMA Connector Jack, Female Socket 50Ohm Board Edge, End Launch Solder", Package=None, Availability=Unavailable, MP=SMA-J-P-H-ST-EM1, Price=None
J2 J5: library part CMP-04767-000004-1, "CONN RCP USB3.1 TYPEC 24P SMD RA", Current Rating=0.25/1.25/5A, Manufacturer=Molex, Package=0, Temperature="-30°C to +85°C", Temperature Range High=+85°C, Temperature Range Low=-30°C, Voltage Rating=30V, Automotive=No, Category=Conn, ComponentLink2Description=Datasheet, ComponentLink2URL=https://www.molex.com/webdocs/datasheets/pdf/en-us/1054500101_IO_CONNECTORS.pdf, Conn Orientation="Right Angle", Contact Material=Gold,Nickel, Device Class L1=Connectors, Device Class L2="USB Connectors", Device Class L3=unset, Digikey Description="CONN RCP USB3.1 TYPEC 24P SMD RA", Footprint Url=https://www.molex.com/pdm_docs/sd/1054500101_sd.pdf, Height=3.44mm, Is Female=yes, Lead Free=Yes, Manufacturer Part Number=1054500101, Mouser Description="USB Shielded I/O Receptacle; Type C; Right Angle; Surface Mount; Gold over Nickel", Number Of Contacts=24, Octopart=https://octopart.com/105450-0101-molex-68082325, Pitch=0.5mm, RoHS=TRUE, Shielding=true, Usb Standard="USB 3.1"
J3 J4: library part 6-534998-2, "Headers & Wire Housings RECEPT 24POS .100 VERT DUAL", Manufacturer_Name="TE Connectivity", Mouser Part Number=571-6-534998-2, Datasheet Link=https://www.te.com/commerce/DocumentDelivery/DDEController?Action=showdoc&DocId=Customer+Drawing%7F534998%7FP7%7Fpdf%7FEnglish%7FENG_CD_534998_P7.pdf%7F6-534998-2, Geometry.Height=6.73mm, Manufacturer_Part_Number=6-534998-2, Mouser Price/Stock=https://www.mouser.co.uk/ProductDetail/TE-Connectivity-AMP/6-534998-2?qs=xDp7PGUNC%252BvdpX02YDLw2A%3D%3D
J6: library part CMP-1743-00001-1, "AMC PCB Jack, 0 to 60 GHz, 60 V, -40 to 90 degC, 4-Pin SMD, RoHS, Tape and Reel", Capacitance="100 uF", Case Code (Imperial)=2917, Case Code (Metric)=7343, Max Operating Temperature="125 degC", Min Operating Temperature="-55 degC", Package Quantity=1, Tolerance=10%, Voltage Rating="10 V", Case\Package=2917, ComponentLink1Description=Datasheet, ComponentLink1URL=http://drawings.amphenolrf.com/Customer_Outline/CA-1JB.pdf, DatasheetVersion="Rev. K, 05/2016", ESR="700 mohm", Height="3.1 mm", Length="7.3 mm", Mount="Surface Mount", PackageDescription="4-Pin Surface Mount Device, Body 2.6 x 2.6 mm", PackageReference=A-1JB, Packaging="Tape and Reel", Pins=2, Radiation Hardening=No, REACH SVHC="No SVHC", RoHSCompliant=true, Voltage Rating (DC)="10 V", Weight="0.023634 oz", Width="4.3 mm"
L1: "IND 47nH 0.3A 700mâ„", Package="0603 Abracon", Availability="In Stock", Check_prices=https://www.snapeda.com/parts/AIMC-0603-47NJ-T/Abracon/view-part/?ref=eda, MF=Abracon, MP=AIMC-0603-47NJ-T, Price=None, Purchase-URL=https://pricing.snapeda.com/search/part/AIMC-0603-47NJ-T/?ref=eda, SnapEDA_Link=https://www.snapeda.com/parts/AIMC-0603-47NJ-T/Abracon/view-part/?ref=snap
L2: library part AIML-0603-R18K-T, "IND 0.18uH 0.05A 600mâ„", Package="1608 Taiyo Yuden", Check_prices=https://www.snapeda.com/parts/AIML-0603-R18K-T/Abracon/view-part/?ref=eda, Digi-Key_Part_Number=535-11612-2-ND, MF=Abracon, MP=AIML-0603-R18K-T, Purchase-URL=https://pricing.snapeda.com/search/part/AIML-0603-R18K-T/?ref=eda, SnapEDA_Link=https://www.snapeda.com/parts/AIML-0603-R18K-T/Abracon/view-part/?ref=snap
L3 L5: "Ind High Frequency Chip Unshielded Multi-Layer 180nH 5% 100MHz 8Q-Factor Ceramic 150mA 0402 T/R", Package=None, Availability=Unavailable, MP=MLG1005SR18JT, Price=None
L4: "100 nH Shielded Multilayer Inductor 50 mA 500mOhm Max 0603 (1608 Metric)", Package="1608 Taiyo Yuden", Availability="In Stock", Check_prices=https://www.snapeda.com/parts/AIML-0603-R10K-T/Abracon/view-part/?ref=eda, MF=Abracon, MP=AIML-0603-R10K-T, Price=None, Purchase-URL=https://pricing.snapeda.com/search/part/AIML-0603-R10K-T/?ref=eda, SnapEDA_Link=https://www.snapeda.com/parts/AIML-0603-R10K-T/Abracon/view-part/?ref=snap
L6: library part CMP-14484-000470-1, "SMD Inductors 4.7uH ±20% 1.2A 0.13Ω 1007", Case Code (Imperial)=1007, Case Code (Metric)=2518, Current Rating=1.2A, DC Resistance (DCR)=130mR, Inductance=4.7uH, Inductance Tolerance=20%, Max Operating Temperature=105°C, Min Operating Temperature=-40°C, Package Quantity=2000, Resistor Type=Wirewound, Saturation Current=310mA, Self Resonant Frequency=46MHz, Test Frequency=7.96MHz, Case/Package=1007, Core Material=Ferrite, Depth=2mm, Halogen Free="Halogen Free", Height=1.8mm, Height - Seated (Max)=0.079inch, Lead Free="Lead Free", Length=0.098inch, Max DC Current=1.2A, Mount="Surface Mount", Packaging="Tape and Reel", Radiation Hardening=No, RoHS Compliant=Yes, Series=CB, Shielding=Unshielded, Termination=SMD/SMT, Tolerance=20%, Width=0.071inch
L7: library part CMP-06042-004740-1, "Film type RF Inductor 1.5nH ±0.2nH 600mA 0.15Ω 0201 (0603)", Case Code (Imperial)=0201, Case Code (Metric)=0603, Current Rating=600mA, DC Resistance (DCR)=150mR, Inductance=1.5nH, Max Operating Temperature=125°C, Min Operating Temperature=-55°C, Package Quantity=15000, Resistor Type="Thin Film", Self Resonant Frequency=15GHz, Test Frequency=500MHz, Case/Package=0201, Core Material=Non-Magnetic, DC Current=600mA, Depth=0.33mm, Height=0.3mm, Height - Seated (Max)=0.013inch, Lead Free="Lead Free", Length=0.024inch, Max DC Current=600mA, Military Standard=Not, Mount="Surface Mount", Packaging="Tape and Reel", Q Factor=14, Radiation Hardening=No, Shielding=Unshielded, Termination=SMD/SMT, Weight=6E-06oz, Width=0.012inch
R1 R3 R12 R13: library part CMP-2000-05024-1, "Chip Resistor, 4.7 KOhm, +/- 5%, 100 mW, -55 to 155 degC, 0603 (1608 Metric), RoHS, Tape and Reel", Case Code - in=0603, Case Code - mm=1608, Manufacturer=Yageo, Operating Temperature Range=-55Cto+155C, Package Description="2-Pin Surface Mount Device, Body 1.6 x 0.8 mm", Package Reference=603, Power Rating=100mW, Resistance=4.7kOhms, Temperature Coefficient=100PPM/C, Tolerance=5%, Voltage Rating=50V, Datasheet URL=http://www.yageo.com/documents/recent/PYu-RC_Group_51_RoHS_L_04.pdf, Datasheet Version="Rev. 4, 02/2016", Manufacturer URL=http://www.yageo.com/, Packaging=Reel, Product=ThickFilmResistorsGeneralPurpose, Series=RC, Termination Style=SMD/SMT
R2 R4 R6 R7 R11: library part CMP-2002-08074-1, Manufacturer=Yageo, Part Number=RC0402JR-13220RL
R5: library part CMP-1010-00080-2, Manufacturer="Vishay Dale", Part Number=CRCW02011K80JNED
R8: library part CMP-1011-00126-2, Manufacturer="Yageo / Phycomp", Part Number=RC0402JR-07150KL
R9 R10 R15: library part CMP-2002-07915-3, "RES 10K OHM 5% 1/16W 0402", Case Code (Imperial)=0402, Case Code (Metric)=1005, Max Operating Temperature=155°C, Max Power Dissipation=63mW, Min Operating Temperature=-55°C, Package Quantity=1, Power Rating=62.5mW, Resistance=10kR, Resistance Tolerance=5%, Resistor Type="Thick Film", Temperature Coefficient=100ppm/°C, Voltage Rating=50V, Case/Package=0402, Construction=Rectangular, Depth=0.5mm, Features="Moisture Resistant", Height=0.016inch, Lead Free="Lead Free", Length=0.039inch, Military Standard=Not, Number of Terminations=2, Packaging="Tape and Reel", RoHS Compliant=Yes, Series=RC, Size Code=0402, Termination=SMD/SMT, Tolerance=5%, Width=0.02inch
R14: library part CMP-1011-00091-2, Manufacturer=Bourns, Part Number=CR0402-JW-512GLF
U1: library part RT820T-QFN24, "High Performance Low Power / Advanced Digital TV Silicon Tuner", Manufacturer_Name="Rafael Technology", Datasheet Link=https://www.rtl-sdr.com/wp-content/uploads/2013/04/R820T_datasheet-Non_R-20111130_unlocked1.pdf, Geometry.Height=0.9mm, Manufacturer_Part_Number=RT820T
U2: library part CMP-209535-000001-1, "LDO Voltage Regulators 1A, 3.3V", Dropout Voltage=1.1V, Manufacturer="Advanced Monolithic Systems", Max Junction Temp=+125°C, Max Power Dissipation=1.2W, Max Supply Voltage=15V, Nominal Supply Current=5mA, Output Current=1A, Output Voltage=3.3V, Package=AMS1117, Temperature="-40°C to +125°C", Temperature Range Low=-40°C, Automotive=No, Category=IC, ComponentLink2Description=Datasheet, ComponentLink2URL=http://www.advanced-monolithic.com/pdf/ds1117.pdf, Device Class L1="Integrated Circuits (ICs)", Device Class L2="Power Management ICs", Device Class L3="Voltage Regulators - Linear", Height=1.8mm, Ipc Land Pattern Name=SOT229P700X180-4, Lead Free=Yes, Manufacturer Part Number=AMS1117-3.3, Number Of Outputs=1, Octopart=https://octopart.com/ams1117-3.3-advanced+monolithic+systems-25899300, Output Type=Fixed, RoHS=TRUE, Standoff Height=0.64mm, Temperature Range High=+125°C
U3: library part CMP-0248-00027-3, "IC USB SERIAL BASIC UART 12DFN", Case/Package=DFN, Max Operating Temperature=85°C, Max Supply Voltage=5.5V, Min Operating Temperature=-40°C, Min Supply Voltage=2.97V, Operating Supply Current=8mA, Operating Supply Voltage=5V, Package Quantity=5000, Data Rate=3Mbps, Height=0.75mm, Interface=UART, Lead Free="Lead Free", Length=3mm, Mount="Surface Mount", Number of Pins=12, Number of Ports=1, Number of Transceivers=1, Packaging="Tape and Reel", REACH SVHC="No SVHC", Width=3mm
U4: library part CMP-2000-05370-2, "IC EEPROM 2K I2C 400KHZ 8SO", Ambient Temperature Range High=+85°C, Ambient Temperature Range Low=-40°C, Frequency=400kHz, Manufacturer=STMicroelectronics, Max Supply Voltage=5.5V, Min Supply Voltage=2.5V, Nominal Supply Current=0.5-1mA, Package=SO8N-SO-A, Temperature="-40°C to +85°C", Access Time=900ns, Automotive=No, Category=IC, ComponentLink2Description=Datasheet, ComponentLink2URL=https://www.st.com/resource/en/datasheet/m24c02-w.pdf, Device Class L1="Integrated Circuits (ICs)", Device Class L2=Memory, Device Class L3=EEPROM, Digikey Description="IC EEPROM 2K I2C 400KHZ 8SO", Height=1.75mm, Interface=I2C, Lead Free=Yes, Manufacturer Part Number=M24C02-WMN6TP, Memory Size=2Kbits, Memory Type=EEPROM, Mouser Description="M24C02 Series 2 Kb (256 x 8) 2.5 V SMT Serial I²C Bus EEPROM - SOIC-8", Octopart=https://octopart.com/m24c02-wmn6tp-stmicroelectronics-55404516, RoHS=TRUE, Standoff Height=0.1mm, Temperature Range High=+85°C, Temperature Range Low=-40°C
U5: "RTL2832U DVB-T COFDM Demodulator + USB 2.0", Manufacturer=Realtek, Package=QFN48, ComponentLink1Description="Work on RTL2832U Datasheet", ComponentLink1URL=https://sites.google.com/site/oh2ftg/home/rtl2832u, Mounting="Surface Mount", Publisher=ftg

## Free pads (board coordinates)
  round 1.524 hole 3.2: 2(22.3,22.3) 3(57.7,22.3) 4(22.3,57.7) 5(57.7,57.7)

## Via types
v1: diameter 0.5, hole 0.2, Top Copper to Bottom Copper, tented both sides, 239 vias
v2: diameter 0.5, hole 0.2, Top Copper to Bottom Copper, 16 vias

## Nets (pads, with @x,y where several pads share a name; then routed paths per layer and width w, separated by ;. In a path a pad name is that pad's centre, name@x,y a point inside that pad or via, vN(x,y) a via of type N, cw(c..) or ccw(c..) an arc to the next point about the centre after c; other vN are vias at no path point)
28_8MHz: C21.2 U1.10 | length 11.2
  Top Copper w0.18: U1.10@46.966,38.394 v1@46.966,39.852
  Signal Layer 2 w0.254: v1(40.107,44.831) 41.338,43.6 42.396,43.6 42.483,43.585 42.605,43.54 46.317,40.413 46.357,40.384 v1(47.036,40.009)
  Bottom Copper w0.254: v1(40.107,44.831) 40.107,44.788 40.335,44.559 40.335,44.264 40.55,44.049 C21.2@40.55,44
DEBUG_UART_RX: J4.8 U3.7 | length 32.9
  Signal Layer 2 w0.254: v1(39.75,44.2) 39.75,42.653 40.726,41.676 41.823,41.676 42.974,40.525 v1(42.974,40.488)
  Bottom Copper w0.2: 34.3,41.775 34.3,41.805 35.067,42.572 38.122,42.572 v1(39.75,44.2)
  Bottom Copper w0.254: J4.8@24.1,33.68 24.1,33.775 23.057,34.818 23.057,39.751 23.206,39.9 29.825,39.9 30.158,39.567 33.626,39.567 33.819,39.76 33.819,39.906 34.291,40.378 34.291,41.745 ; v1(42.974,40.488) 42.993,40.507 42.993,41.106 U3.7@43.242,41.355
DEBUG_UART_TX: J4.6 U3.10 | length 39
  Signal Layer 1 w0.254: v1(32.057,41.947) 32.712,41.947 32.815,42.05 35.004,42.05 35.575,42.621 35.866,42.621 36.015,42.77 36.015,43.334 36.31,43.629 36.951,43.629 37.1,43.48 37.1,42.916 37.395,42.621 37.813,42.621 37.84,42.648 38.887,42.648 39.401,43.161 40.899,43.161 41.321,42.74 v1(41.369,42.74)
  Bottom Copper w0.2: 42.953,42.721 U3.10@43.534,42.721
  Bottom Copper w0.254: J4.6@24.1,31.14 23.045,31.14 21.547,32.637 cw(c21.56,33.68) 20.522,33.581 ccw(c20.269,33.557) 20.457,33.728 20.457,34.707 20.457,41.6 cw(c20.738,41.536) 20.598,41.788 ccw(c20.475,42.01) 20.687,41.87 cw(c21.56,41.3) 21.202,42.28 cw(c21.64,41.082) 21.771,42.35 26.537,42.35 27.152,41.992 27.221,41.992 29.104,41.992 29.106,41.992 v1(32.057,41.947) ; v1(41.369,42.74) 41.417,42.787 41.417,42.994 41.756,43.333 42.341,43.333 42.953,42.721
E_SCL: R2.1 U5.16 | length 22.3
  Top Copper w0.12: U5.16@36.95,47.625 36.966,47.641 36.966,49.415 v1(37.019,49.469)
  Signal Layer 2 w0.254: v1(37.019,49.469) 37.023,49.469 37.916,48.575 39.525,48.575 43.1,45 43.757,45 47.359,41.398 50.228,41.398 51.357,40.268 51.357,38.9 v1(50.683,38.226)
E_SDA: R4.1 U5.17 | length 19.9
  Top Copper w0.14: v1(36.444,49.219) 36.496,49.167 36.496,48.52 36.55,48.466 U5.17@36.55,48.05
  Signal Layer 2 w0.254: v1(36.444,49.219) 36.444,49.157 38.101,47.5 40.059,47.5 46.059,41.5 46.6,41.5 47.71,40.39 48.55,40.39 48.676,40.516 v1(50.393,40.516)
  Bottom Copper w0.254: v1(50.393,40.516) 50.393,40.466 50.591,40.267 50.591,39.863 50.729,39.725 R4.1@50.8,39.725
EXTRA_USB_D_N: D2.3 J4.19 | length 8.8
  Top Copper w0.21: J4.19@21.56,48.92 21.56,49.731 cw(c21.844,49.731) 21.844,50.015 22.327,50.015 cw(c22.327,49.659) 22.682,49.659 22.682,48.336 ccw(c23.642,48.336) 23.642,47.377 ccw(c23.642,47.587) 23.652,47.377 24.051,47.396 cw(c24.1,46.38) 24.118,47.397 25.298,47.377 25.346,47.377 cw(c25.346,47.167) 25.556,47.167 25.556,47.125 ccw(c25.75,47.125) 25.75,46.931 26.14,46.931 cw(c26.14,46.721) 26.35,46.721 D2.3@26.35,46.475 D2.3@26.05,46.475
EXTRA_USB_D_P: D2.1 J4.21 | length 8.4
  Top Copper w0.21: J4.21@21.56,51.46 21.56,50.649 ccw(c21.844,50.649) 21.844,50.365 22.327,50.365 cw(c22.327,49.659) 23.032,49.659 23.032,48.336 ccw(c23.642,48.336) 23.642,47.727 25.407,47.727 ccw(c25.406,47.936) 25.585,47.826 cw(c25.75,47.725) 25.75,47.919 26.065,47.919 ccw(c26.064,48.129) 26.237,48.01 ccw(c25.702,48.375) 26.314,48.161 ccw(c26.115,48.229) 26.314,48.163 26.314,48.18 D2.1@26.35,48.375 D2.1@26.19,48.215